# EAGLE board stage_light (EAGLE 6.6.0)
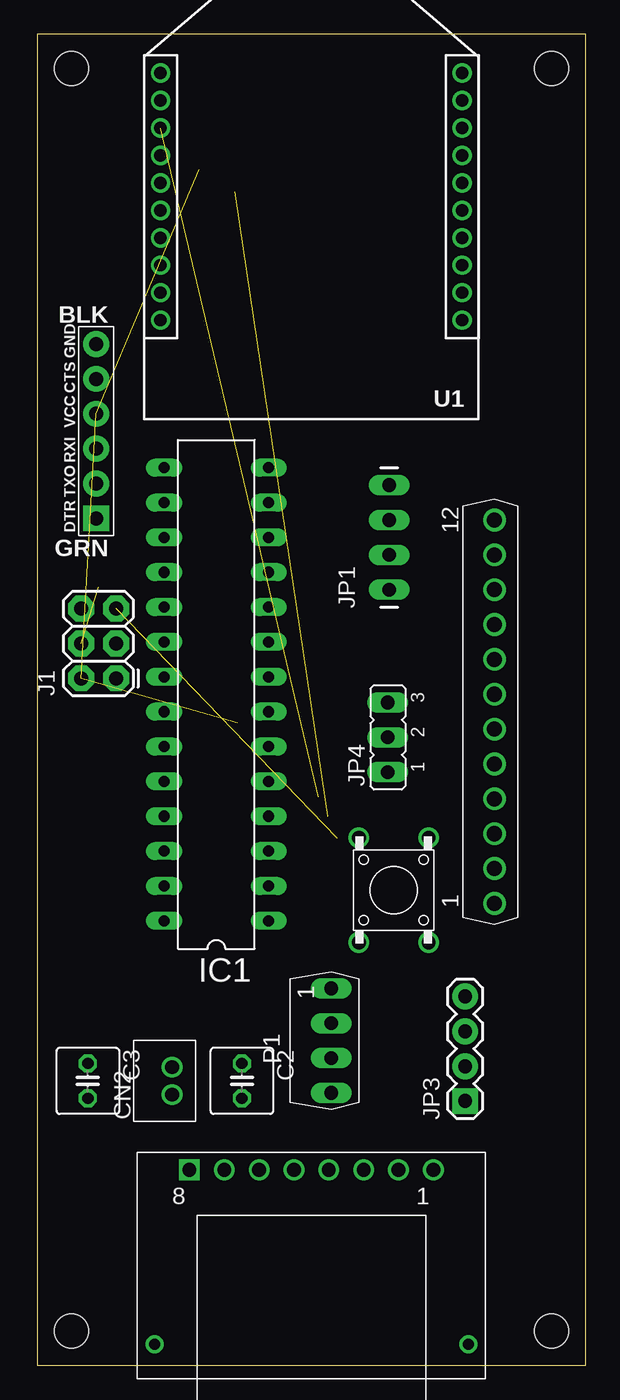
[diagram p0: board, top side]
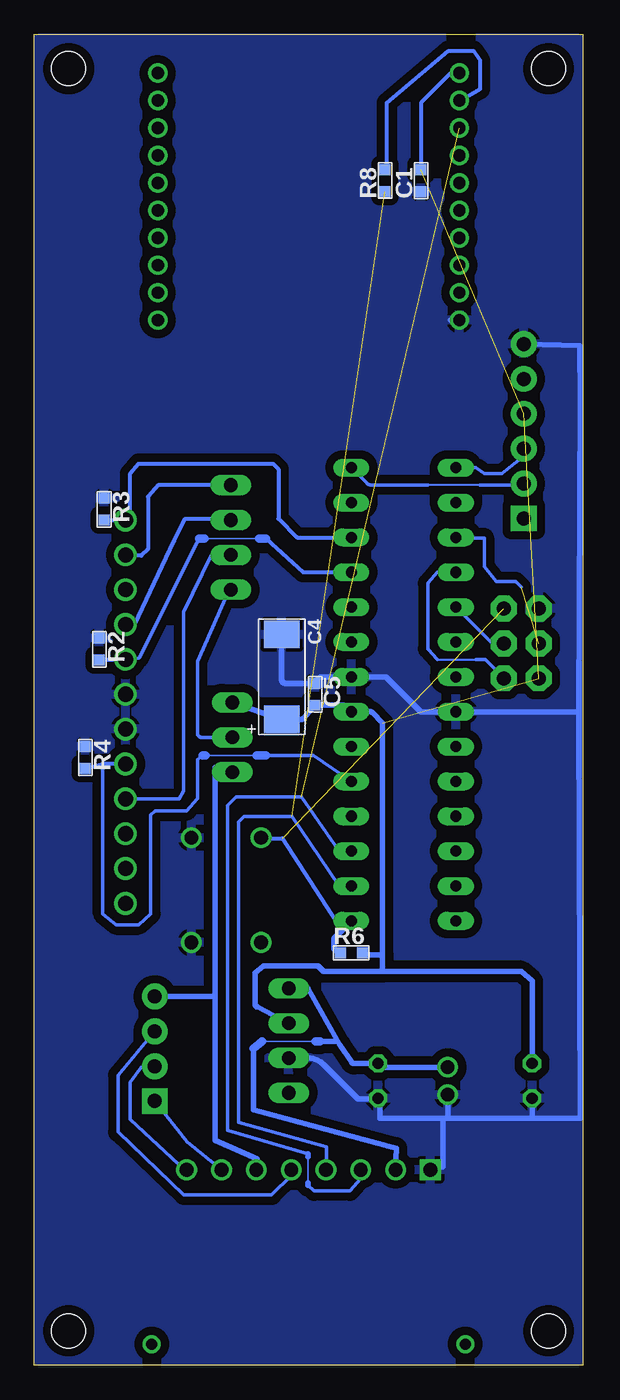
[diagram p1: board, bottom side, seen from below]

Size 40 x 97 mm. Coordinates in mm from the lower left corner, seen from the top.
Outline: 40,0 40,97 0,97 0,0 40,0
Copper layers (1*16): Top 0.035mm / dielectric 1.5mm / Bottom 0.035mm
Design rules "default *": minimum track width 10mil, minimum drill 24mil, track to track 8mil, track to pad 8mil, pad to pad 8mil, via to via 8mil, smd to smd 8mil, copper to edge 0mil, drill to drill 8mil, minimum pad ring 10mil, minimum via ring 8mil, stop-mask expansion 4mil, vias tented up to drill 0mil, thermal gap 10mil
Holes 2.5 mm at 37.5,94.5 2.5,94.5 2.5,2.5 37.5,2.5

## Footprints (pad centres in the part's own frame; a part is rotated, then mirrored left to right if it is on the bottom)
1608(1.6*0.8MM) = smd 0.8 x 0.8: P$1 0.8,0; P$2 -0.8,0
C025-050X050 = drill 0.813 octagon: 1 -1.27,0; 2 1.27,0
6134(6.1*3.4MM)_POLAR = smd 2 x 2.6: + 3.1,0; - -3.1,0
AE-RJ-45-LAN-DIP-A = drill 1 square: 1 -8.89,8.89 | drill 1: 2 -6.35,8.89; 3 -3.81,8.89; 4 -1.27,8.89; 5 1.27,8.89; 6 3.81,8.89; 7 6.35,8.89; 8 8.89,8.89 | drill 0.8: P$11 -11.43,-3.81; P$12 11.43,-3.81
B2B-PH-K-S(2MM_PITCH) = drill 1: 1 1,0; 2 -1,0
DIL28-3 = drill 0.813 long: 1 -16.51,-3.81; 2 -13.97,-3.81; 3 -11.43,-3.81; 4 -8.89,-3.81; 5 -6.35,-3.81; 6 -3.81,-3.81; 7 -1.27,-3.81; 8 1.27,-3.81; 9 3.81,-3.81; 10 6.35,-3.81; 11 8.89,-3.81; 12 11.43,-3.81; 13 13.97,-3.81; 14 16.51,-3.81; 15 16.51,3.81; 16 13.97,3.81; 17 11.43,3.81; 18 8.89,3.81; 19 6.35,3.81; 20 3.81,3.81; 21 1.27,3.81; 22 -1.27,3.81; 23 -3.81,3.81; 24 -6.35,3.81; 25 -8.89,3.81; 26 -11.43,3.81; 27 -13.97,3.81; 28 -16.51,3.81
2X3 = drill 1.016 pad 1.88 octagon: 1 0,0; 2 0,2.54; 3 2.54,0; 4 2.54,2.54; 5 5.08,0; 6 5.08,2.54
1X04_LONGPADS = drill 1 pad 1 long: 1 0,0; 2 2.54,0; 3 5.08,0; 4 7.62,0
FTDI_DEVICE_SIDE = drill 1.016 pad 1.88 square: P$1 -6.35,0 | drill 1.016 pad 1.88: P$2 -3.81,0; P$3 -1.27,0; P$4 1.27,0; P$5 3.81,0; P$6 6.35,0
1X04 = drill 1.016 pad 1.88 square: 1 0,0 | drill 1.016 pad 1.88: 2 2.54,0; 3 5.08,0; 4 7.62,0
JP2 = drill 1 pad 1 long: 1 -2.54,0; 2 0,0; 3 2.54,0
PQ3RD23 = drill 1 pad 1.2 long: 1 -3.81,0; 2 -1.27,0; 3 1.27,0; 4 3.81,0
MP4401 = drill 1.1: 1 -13.97,0; 2 -11.43,0; 3 -8.89,0; 4 -6.35,0; 5 -3.81,0; 6 -1.27,0; 7 1.27,0; 8 3.81,0; 9 6.35,0; 10 8.89,0; 11 11.43,0; 12 13.97,0
1608(1.6*0.8MM)' = smd 0.8 x 0.8: P$3 -0.8,0; P$4 0.8,0
PUSH_SW = drill 1: 1 -3.81,2.54; 2 3.81,2.54; 3 3.81,-2.54; 4 -3.81,-2.54
XBEE_ON_XPPN101BFCN-RC = drill 0.9: 1 -11,18; 2 -11,16; 3 -11,14; 4 -11,12; 5 -11,10; 6 -11,8; 7 -11,6; 8 -11,4; 9 -11,2; 10 -11,0; 11 11,0; 12 11,2; 13 11,4; 14 11,6; 15 11,8; 16 11,10; 17 11,12; 18 11,14; 19 11,16; 20 11,18

## Placement (x,y rotation side)
C1  [1608(1.6*0.8MM)]  11.8,86.33 90 bottom
C2  50u  [C025-050X050]  14.93,20.72 270 top
C3  50u  [C025-050X050]  3.7,20.72 270 top
C4  [6134(6.1*3.4MM)_POLAR]  21.96,50.17 270 bottom
C5  [1608(1.6*0.8MM)]  19.52,48.9 270 bottom
CN1  RJ45-8DIP  [AE-RJ-45-LAN-DIP-A]  20,5.35 0 top
CN2  2POLE-PH_TOP  [B2B-PH-K-S(2MM_PITCH)]  9.85,20.72 90 top
IC1  MEGA8-P  [DIL28-3]  13.07,48.9 90 top
J1  AVR_SPI_PRG_6PTH  [2X3]  5.76,50.06 90 top
JP1  [1X04_LONGPADS]  25.67,56.52 90 top
JP2  FTDI_DEVICE  [FTDI_DEVICE_SIDE]  4.31,68.07 90 top
JP3  [1X04]  31.21,19.25 90 top
JP4  [JP2]  25.57,45.76 90 top
P1  PQ3RD23  [PQ3RD23]  21.45,23.66 270 top
Q1  MP4401  [MP4401]  33.35,47.63 90 top
R2  10k  [1608(1.6*0.8MM)']  35.26,52.19 270 bottom
R3  10k  [1608(1.6*0.8MM)']  34.9,62.39 270 bottom
R4  10k  [1608(1.6*0.8MM)']  36.28,44.29 270 bottom
R6  [1608(1.6*0.8MM)']  16.88,30.05 0 bottom
R8  10k  [1608(1.6*0.8MM)']  14.42,86.34 90 bottom
SW1  PUSH_SWNORMAL  [PUSH_SW]  26,34.63 270 top
U1  XBEE_PROXPPN101BFCN  [XBEE_ON_XPPN101BFCN-RC]  20,76.17 0 top

## Library data of the parts
C1 C4 C5 = Capasitor
C2 C3 = rcl
CN1 = Connector-etc
CN2 = Connector-Housing
IC1 = atmel; OC_FARNELL: unknown; OC_NEWARK: unknown
J1 JP1-JP3 = SparkFun-Connectors
JP4 = Jumper
P1 = Voltage Regulator
Q1 = FET n-ch
R2-R4 R6 R8 = Resistor
SW1 = Switch
U1 = ZigBee Modules

## Nets
AVCC: IC1.20
GND: C1.P$2 C2.2 C3.2 C4.- C5.P$2 CN1.1 CN2.2 IC1.8 IC1.22 J1.6 JP2.P$6 P1.3 Q1.6 Q1.7 R2.P$3 R3.P$3 R4.P$3 SW1.1 SW1.2 U1.10
N$1: JP1.3 Q1.9
N$2: JP1.2 Q1.4
N$3: IC1.12 Q1.12 R3.P$4
N$4: IC1.11 Q1.8 R2.P$4
N$5: IC1.5 Q1.5 R4.P$4
N$6: JP1.4 Q1.11
N$7: IC1.14 JP2.P$2
N$8: IC1.15 JP2.P$3
N$9: CN1.8 JP3.2
N$10: CN1.5 JP3.3
N$11: CN1.7 JP3.1
N$12: IC1.1 J1.5 R6.P$3 SW1.4
N$13: R8.P$4 U1.2
N$15: CN1.4 IC1.2 R8.P$3
N$16: CN1.3 IC1.3 U1.3
N$18: IC1.18 J1.1
N$19: IC1.19 J1.3
N$20: IC1.17 J1.4
VCC1: C2.1 CN1.2 CN2.1 P1.1
VCC2: C1.P$1 C3.1 C4.+ C5.P$1 IC1.7 J1.2 JP2.P$4 JP4.3 P1.2 R6.P$4 U1.1
VCC3: JP1.1 JP4.2
VCC4: CN1.6 JP3.4 JP4.1

## Tracks (layer width: path | path; a pad name or v marks a point on that pad's centre or on a via)
GND
  Bottom 0.2: C5.P$2 19.42,49.92 arc90 19.17,50.17 | IC1.22 arc45 9.09,47.7 8.7,47.7
  Bottom 0.406: C3.2 3.7,18 | P1.3 20.09,22.41 arc45 18.92,21.92 16.4,19.4 15.05,19.4 | 15.05,19.4 arc-45 C2.2 | U1.10 9.66,76.17 | 0.3,47.6 0.2,70.4 0.22,74.32 JP2.P$6 | 0.3,47.6 0.2,18 3.7,18 | C4.- 21.96,49.95 arc-90 21.71,49.7 C5.P$2 | 19.17,50.17 IC1.8 14.37,50.17 11.8,47.6 8.8,47.6 8.7,47.7 8.5,47.6 0.3,47.6 | 3.7,18 9.85,18 | 9.85,18 10.2,18 | 10.2,18 14.8,18 14.8,19.15 arc-90 15.05,19.4 | CN2.2 9.85,18 | CN1.1 10.2,14.44 10.2,18
  pour Bottom (isolate 0.6): 0.3,0.3 0.3,96.7 39.7,96.7 39.7,0.3
N$1
  Bottom 0.2: Q1.9 32.7,54 | 25.77,61.7 JP1.3
  Bottom 0.305: 32.7,54 29.8,60.1 29,61.7 25.77,61.7
N$2
  Bottom 0.2: 25.83,59 JP1.2
  Bottom 0.254: Q1.4 29.45,41.28 29.1,41.83 29.1,54.9 27.1,59 25.83,59
N$3
  Bottom 0.254: R3.P$4 35.1,61.6 | Q1.12 33,61.6
  Bottom 0.305: 33,61.6 33,65 32.4,65.7 22.6,65.7 22.2,65.3 22.2,61.7 20.83,60.33 IC1.12 | 35.1,61.6 Q1.12
N$4
  Bottom 0.1: IC1.11 | 23.6,60.25 27.6,60.25
  Bottom 0.254: Q1.8 32.36,51.54 28,60.25 | R2.P$4 34.86,51.44
  Bottom 0.305: 23.1,60.25 20.4,57.8 IC1.11 | 34.86,51.44 Q1.8
  Bottom 0.61: 28,60.25 27.6,60.25 | 23.6,60.25 23.1,60.25
N$5
  Bottom 0.1: 23.8,44.45 27.5,44.45
  Bottom 0.254: 27.75,44.45 28.1,44.15 28.1,41.3 28.9,40.4 31.2,40.4 31.5,40.1 31.5,32.9 32.4,32.1 34.05,32.1 35,32.9 35,43.81 | 23.1,44.45 19.63,44.45 IC1.5 | Q1.5 33.05,43.81
  Bottom 0.305: 33.05,43.81 35,43.81 R4.P$4
  Bottom 0.61: 27.75,44.45 27.5,44.45 | 23.8,44.45 23.1,44.45
N$6
  Bottom 0.2: 32.99,59 Q1.11
  Bottom 0.305: JP1.4 30.96,64.14 31.7,63.3 31.7,59.5 32.2,59 32.99,59
N$7
  Bottom 0.1: 4.87,64.15 JP2.P$2
  Bottom 0.15: 7.5,64.15 11.3,64.15
  Bottom 0.254: 4.87,64.15 7.5,64.15 | 11.3,64.15 15.46,64.15 arc45 15.74,64.27 IC1.14
N$8
  Bottom 0.127: 4.5,66.11 JP2.P$3
  Bottom 0.254: IC1.15 7.81,65.41 7.2,65 5.9,65 5,65.7 4.5,66.11
N$9
  Bottom 0.254: CN1.8 28.98,14.18 33,17.9 33,20.6 32.21,21.69 JP3.2
N$10
  Bottom 0.254: JP3.3 33.9,21.14 33.9,17 29.1,12.4 22.7,12.4 21.26,13.84 CN1.5
N$11
  Bottom 0.254: JP3.1 28.84,16.28 CN1.7
N$12  (1 unrouted)
  Bottom 0.2: 16.88,32.2 IC1.1
  Bottom 0.254: 17.9,32.2 16.88,32.2
  Bottom 0.305: SW1.4 23.4,38.4 21.9,38.4 17.9,32.2
  Bottom 0.406: IC1.1 18.15,31.12 18.15,30.43 arc-45 18.08,30.25 R6.P$3
N$13
  Bottom 0.3: R8.P$4 14.3,87.14 14.3,92 9.8,95.8 8,95.8 7.5,95.1 7.5,93 8.93,92.17 U1.2
N$15  (1 unrouted)
  Bottom 0.2: 17.8,35 arc-45 17.62,34.93 IC1.2 | 18.7,14.93 CN1.4
  Bottom 0.254: 17.8,35 21.2,40 24.7,40 25.09,39.6 25.1,38.4 25.1,17.7 18.7,15.9 18.7,14.93
N$16  (1 unrouted)
  Bottom 0.1: 20.05,13.3 20.05,15.2
  Bottom 0.2: IC1.3 17.77,37.47
  Bottom 0.254: 17.77,37.47 20.5,41.4 25.3,41.4 25.9,40.8 25.9,17.1 20.05,15.4 | CN1.3 16.18,13.62 17,12.7 19.59,12.7 20.05,13.1
  Bottom 0.406: 20.05,15.4 20.05,15.2 | 20.05,13.1 20.05,13.3
N$18
  Bottom 0.15: 10.6,51.45 7.8,51.45
  Bottom 0.254: IC1.18 10.61,57.79 11.3,57 11.3,52.2 10.6,51.45 | 7.8,51.45 7.1,51.45 J1.1
N$19
  Bottom 0.1: 6.61,52.6 J1.3
  Bottom 0.254: 6.61,52.6 IC1.19
N$20  (1 unrouted)
  Bottom 0.254: IC1.17 9.26,60.3 7.2,60.3 7.2,58.2 6.3,57.1 4.9,57.1 4.5,56.7
VCC1
  Bottom 0.1: 18.04,23.6 17.73,23.39 | 19.5,23.6 23.4,23.6
  Bottom 0.406: CN2.1 14.55,21.72 arc45 14.73,21.79 C2.1 16.66,21.99 arc45 16.84,22.06 17.73,23.39 20.04,27.46 P1.1 | CN1.2 13.61,15.81 24,18.6 24,23.1 | 19.15,23.6 18.04,23.6
  Bottom 0.61: 24,23.1 23.4,23.6 | 19.5,23.6 19.15,23.6
VCC2  (3 unrouted)
  Bottom 0.2: R6.P$4 14.6,29.85
  Bottom 0.3: U1.1 9.69,94.11 11.8,92 C1.P$1
  Bottom 0.406: P1.2 23.73,26.11 arc45 23.9,26.29 23.9,28.59 23.3,29.1 19.3,29.1 18.9,28.7 14.6,28.7 | R6.P$4 arc45 15.96,29.9 14.6,29.9 14.6,46.8 15.36,47.56 arc-45 15.54,47.63 IC1.7 17.28,48.03 arc-45 17.45,48.1 C5.P$1 20.38,47.14 arc45 20.55,47.07 C4.+ JP4.3 | 14.6,28.7 4.5,28.7 3.7,28 C3.1 | 14.6,29.85 14.6,28.7
VCC3
  Bottom 0.2: 25.79,56.5 arc-90 JP1.1
  Bottom 0.254: JP4.2 27.75,45.76 arc90 28.1,46.01 28.1,51.3 25.79,56.5
VCC4
  Bottom 0.406: CN1.6 23.76,15.06 26.8,16.4 26.8,26.8 | 26.8,26.8 26.8,43.55 JP4.1 | JP3.4 26.87,26.87 26.8,26.8

## Text on the board
Notes: 通常なら、外形線とベタパターン間には距離を取るし、溶かす銅が少なくなるように空白を減らす。ここでは、CNCでの加工を考えているため余計なベタをなくした。